# Altium PCB MCU098_MSPM0G3507_PCB.PcbDoc (part 5 of 5)
Units mil, origin at the board's own origin, x right, y up, seen from the top; angles counter-clockwise.
Board outline 2310.03 x 4205.03 mil, 4 copper layers (Top Layer, VCC Layer, GND Layer, Bottom Layer), stack 62.4 mil thick; 260 components, 182 nets, 835 pads, 237 vias.
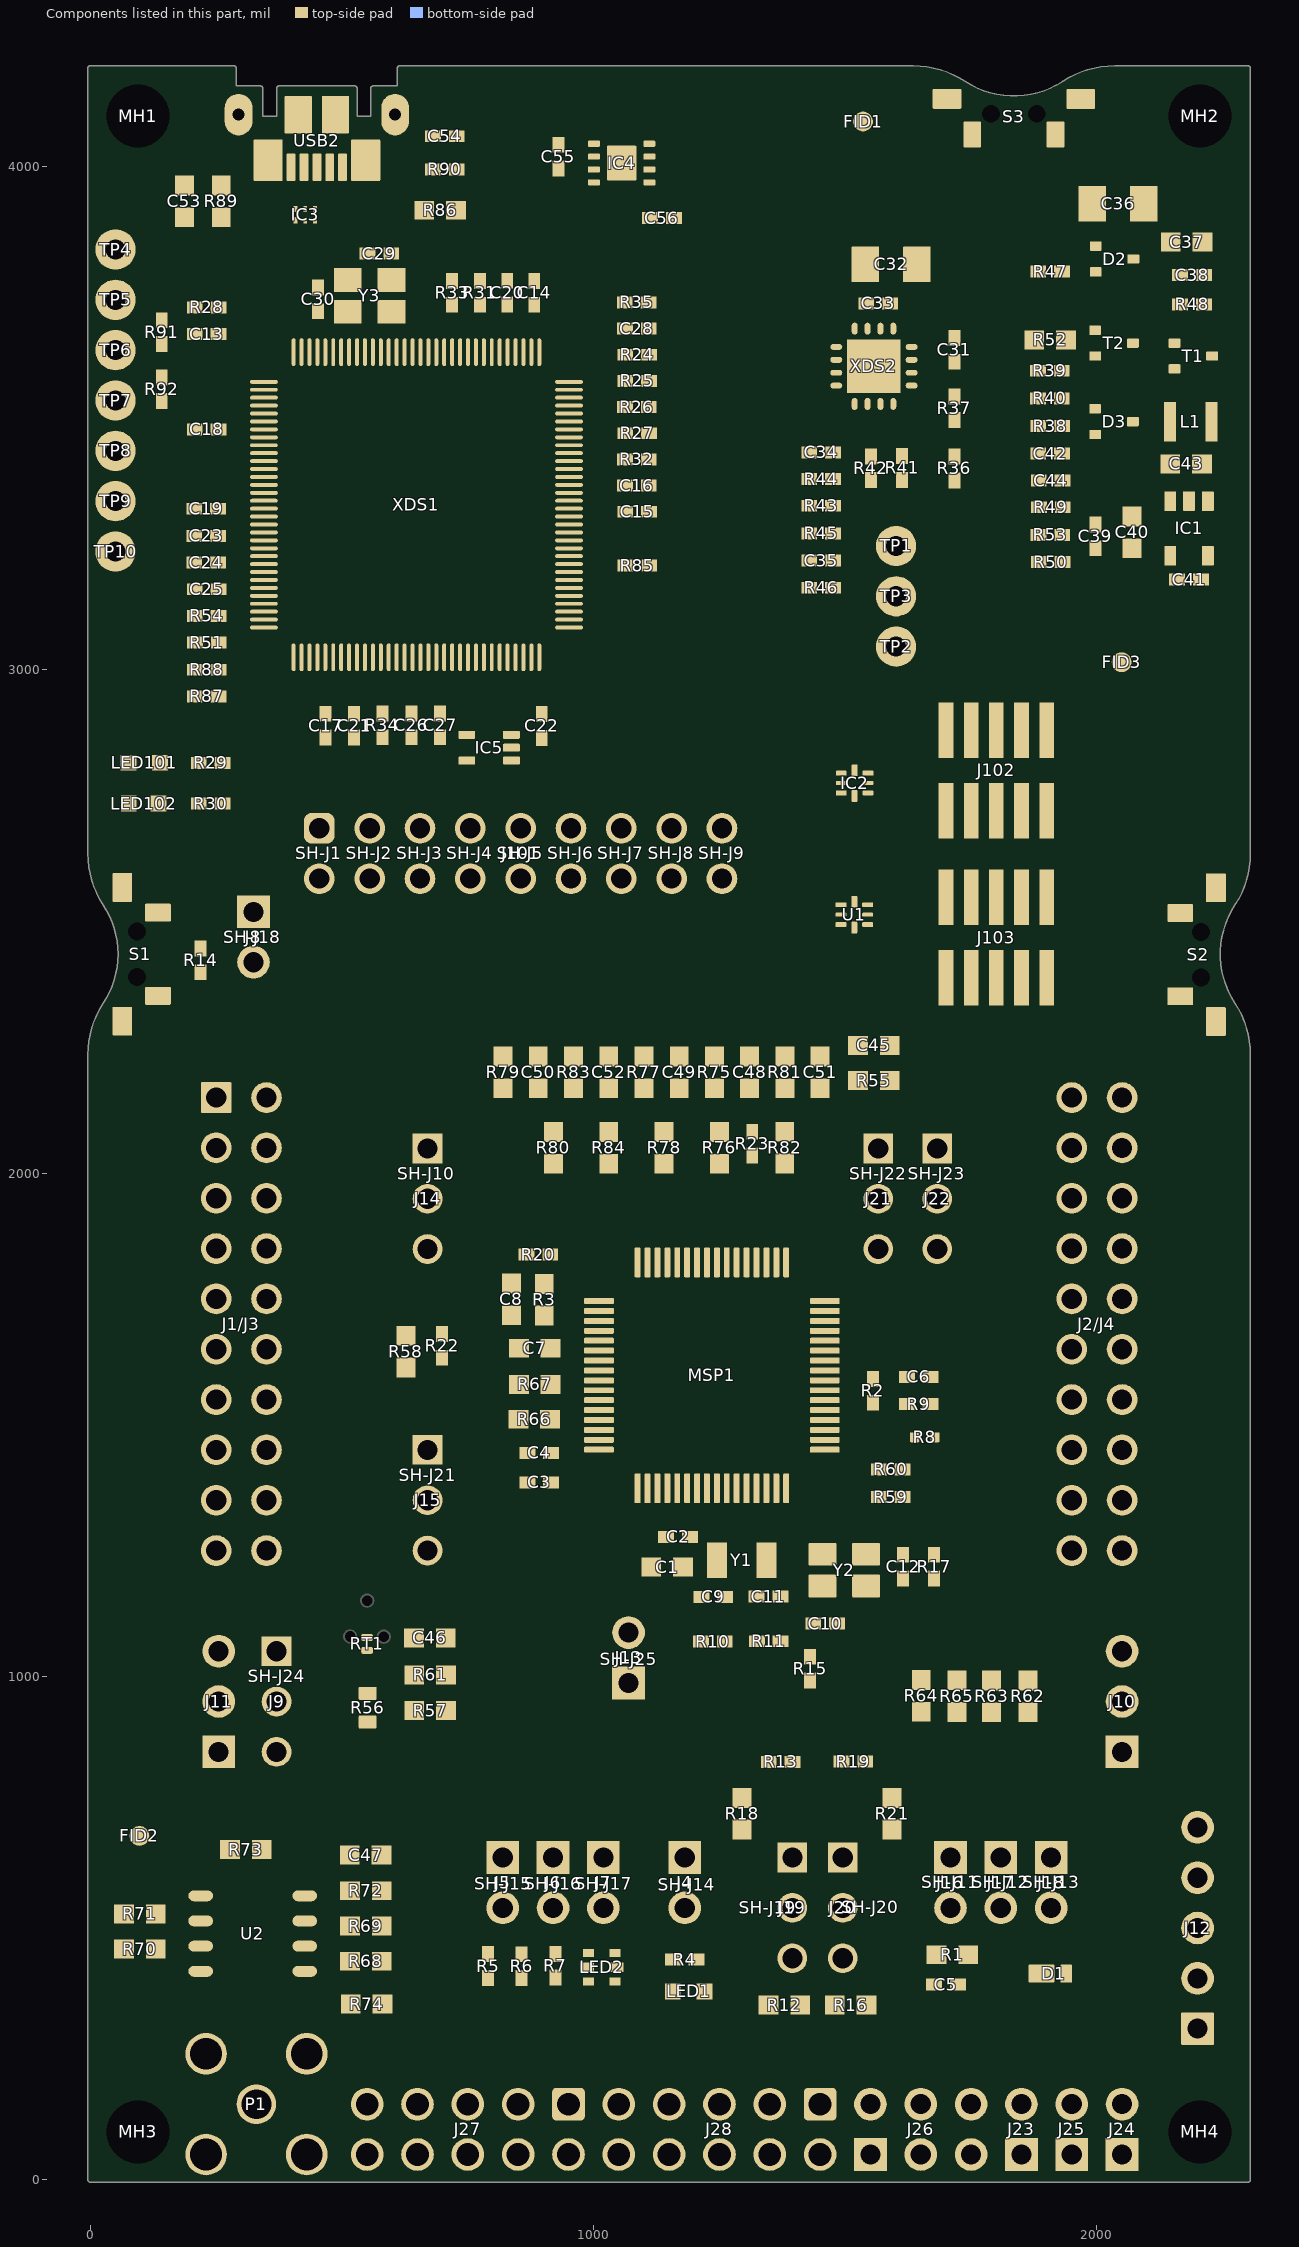
[diagram p6: the components of this part, seen from the top]

## Polygon pours and split planes (outlines as drawn)
GND on Top Layer "TOP_LAYER_GND_P034" (solid, remove dead copper, pour order 34): 0,2635 2300,2635 2300,0 713,0 713,780.96 0.04,780.96 0,781
XDS_GND on Top Layer "TOP_LAYER_XDS_GND_P010" (solid, remove dead copper, pour order 10): -6,4201 2306,4201 2306,2635 -6,2635
GND on Top Layer "TOP_LAYER_GND_P022" (solid, remove dead copper, pour order 22): 0,760 689.04,760 689.12,100.84 490.16,100.84 490.16,0.16 0.16,0.16
XDS_VCC on Top Layer "TOP_LAYER_XDS_VCC_P004" (solid, pour order 4): 1140,3985 1230,3985 1230,3845 1140,3845
GND on GND Layer "GND_LAYER_GND_P030" (solid, remove dead copper, pour order 30): 0,2635 2300,2635 2300,0 713,0 713,780.96 712.96,781 0,781
GND on GND Layer "GND_LAYER_GND_P026" (solid, remove dead copper, pour order 26): 0,760 689.12,760 689.12,100.84 688.28,100 490.16,100 490.16,0.16 0.08,0.08
XDS_GND on GND Layer "GND_LAYER_XDS_GND_P008" (solid, remove dead copper, pour order 8): -6,4201 2306,4201 2306,2635 -6,2635
3V3 on VCC Layer "VCC_LAYER_3V3_P032" (solid, remove dead copper, pour order 32): 810.03,781 810.03,1979.03 809.53,1979.53 1670,1979.53 1670,200 1799,200 1800,199 1800,0 2300,0 2300,2635 0,2635 0,781
GND on VCC Layer "VCC_LAYER_GND_P024" (solid, remove dead copper, pour order 24): 0,760 689.12,760 689.12,100.84 490.16,100.84 490.16,0.16 0,0
XDS_VCC on VCC Layer "GND_LAYER_GND_P-001" (solid, remove dead copper, pour order 38): 0,4195 2300,4195 2300,2635 0,2635
GND on Bottom Layer "BOTTOM_LAYER_GND_P036" (solid, remove dead copper, pour order 36): 0,2635 2300,2635 2300,0 713,0 713,780.96 0.04,780.96 0,781
GND on Bottom Layer "BOTTOM_LAYER_GND_P028" (solid, remove dead copper, pour order 28): 0,760 689.04,760 689.12,100.84 490.16,100.84 490.16,0.16 0,0
XDS_GND on Bottom Layer "BOTTOM_LAYER_XDS_GND_P014" (solid, remove dead copper, pour order 14): -6,4201 2306,4201 2306,2635 -6,2635

## Keep-outs
Keep-Out Layer:
  text ".Layer_Name" at 527,-1523.49 h30

## Other copper
Top Layer:
  pour cut-out: 1066.51,2005.88 1067.52,2006.9 1104.3,2006.9 1104.3,1894.73 1063.1,1853.53
  pour cut-out: 599.99,780.96 631.47,780.96 677.87,827.37 677.87,827.94 737.66,827.94 866.42,956.69 866.42,996.4 868.17,998.16 823.34,998.16 823.34,988.24 753.6,918.5 728.84,918.5 676.81,904.46 675.54,905.73 600.68,905.73
  pour cut-out: 406.6,814.25 400.92,814.25 391.03,824.14 420,853.11 432.79,853.11 499.14,919.47 505.79,919.47
  pour cut-out: 433,934 437.31,923.5 444.47,910.24 468.2,933.97 468.29,933.97
  pour cut-out: 583,1175.1 611.47,1175.1 611.47,1109.2 607.54,1109.2
  pour cut-out: 1849,494.1 1963.28,492.42 1962.43,359.5 1849,359.5
  pour cut-out: 1928.42,2326 1928.42,2484 1727.58,2484 1727.58,2326
  pour cut-out: 1928.42,2656 1928.42,2814 1727.58,2814 1727.58,2656
  pour cut-out: 1447,1156.65 1480.53,1156.65 1481.53,1157.65 1481.53,1030.39 1455.14,1004 1444.88,1004
  pour cut-out: 1689.03,1245.54 1689.49,1246 1689.49,1201.49 1687,1199 1512.84,1199 1508.34,1203.5 1508.34,1245.54
  pour cut-out: 939,373 952.81,373 952.81,362 951.81,363 939.14,363
  pour cut-out: 1014.63,379 1047.36,379 1048,378.36 1048,359 1015.63,359 1014.63,360
  pour cut-out: 1625.8,645.8 1636.86,645.8 1668.06,677 1675,670.06 1673,359.34 1631.34,359.34
  pour cut-out: 711.62,1561.3 732.32,1555.67 753.51,1551.54 746.51,1254.51 745,1253 736.13,1261.87 705,1261.87
  pour cut-out: 1280.41,1262.5 1307.97,1262.5 1306.72,1261.24 1306.72,1178.57 1280.07,1178.57 1280,1178.5 1280,1262.08
  pour cut-out: 1891.63,1965.67 1678.64,1752.68 1678.64,1731.36 1690.89,1719.11 1819.11,1719.11 1950,1850 1950,1939.79
  pour cut-out: 1699.39,1889.25 1717.69,1870.94 1717.69,1869.87 1728.96,1869.87 1953.5,2094.41 1952.4,2095.5 1952.4,2114.25 1933.37,2114.25 1930.62,2117
  pour cut-out: 882.87,1415.19 899.59,1415.19 899.59,1414.08 882.87,1414.08
  pour cut-out: 882.87,1415.19 899.59,1415.19 899.59,1414.08 882.87,1414.08
  pour cut-out: 612.37,511 620.78,511 621,510.78 621,468.29 612.37,468.29
  text ".Layer_Name" at 527,-1523.49 h30
VCC Layer:
  pour cut-out: 624.77,811.49 624.77,781.87 623.86,780.96 599.99,780.96
  pour cut-out: 561,811.49 561,780.87 561.09,780.96 576.33,780.96
  text ".Layer_Name" at 527,-1523.49 h30
GND Layer:
  pour cut-out: 560.84,808.35 560.84,781.15 561,781 561.7,781.71 575.08,781.71
  text ".Layer_Name" at 527,-1523.49 h30
Bottom Layer:
  pour cut-out: 741.57,1030.47 741.57,970.96 752.17,960.36 775.18,983.37 834.16,983.37 834.16,995.31 797.72,1031.75
  pour cut-out: 548,1233 548,1195.91 595.47,1195.91 573.5,1217.88 573.5,1220.09
  pour cut-out: 624.77,811.49 624.77,780.96 599.99,780.96
  pour cut-out: 560.84,808.35 560.84,781.15 561.04,780.96 576.33,780.96
  text ".Layer_Name" at 527,-1523.49 h30

## Silkscreen, mask and mechanical layers (free items; w line width, h text height)
Top Overlay:
  drawing of 1933 lines, arcs and shapes, not listed
  text "MSP NRST" at 1606.35,3946.95 h40
  text "Rev. A" at 2264.13,2813.42 h50 r90
  text "XDS110-ET Debug Probe" at 428.03,2753 h30
  text "Rev1.4" at 1158,2747 h30
  text "XDS110 Out" at 1650.72,2668 h30 r90
  text "LP-MSPM0G3507" at 2205.15,2665.28 h65 r90
  text "(PB21)" at 1946.02,2381.37 h40
  text "BSL" at 1277.43,2376.37 h40 r90
  text "NRST" at 980,2358 h40 r90
  text "SWDIO" at 1074.13,2342 h40 r90
  text "SWCLK" at 1169.54,2342 h40 r90
  text "RXD<<" at 775,2340 h40 r90
  text "TXD>>" at 875,2340 h40 r90
  text "XDS110 In" at 1647,2340.5 h30 r90
  text "(PA18)" at 240.75,2280.75 h40
  text "PB4" at 1750,2130 h60
  text "PB4" at 1750.21,2130 h60
  text "XDS" at 1404.48,2031.35 h60
  text "PA25" at 50,2030 h60
  text "PB1" at 1750,2030 h60
  text "PB12" at 2160,2030 h60
  text "PB23" at 735.69,2027 h60
  text "SW1" at 50,1930 h60
  text "PB19" at 460,1930 h60
  text "PA28" at 1750,1930 h60
  text "PB17" at 2160,1930 h60
  text "SW1" at 751.47,1927.61 h60
  text "UART" at 1479.2,1899.56 h40 r90
  text "MSPM0G3507" at 1075.32,1867.37 h50
  text "BP" at 1440.73,1834.22 h60
  text "PA8" at 50,1830 h60
  text "PA22" at 460,1830 h60
  text "PA9" at 735,1830 h60
  text "PA31" at 1750,1830 h60
  text "PB15" at 2160,1830 h60
  text "PA26" at 50,1730 h60
  text "PB18" at 460,1730 h60
  text "PB20" at 1750,1730 h60
  text "NRST" at 2160,1730 h60
  text "PB24" at 50,1630 h60
  text "PA18" at 460,1630 h60
  text "PB13" at 1750,1630 h60
  text "PB8" at 2160,1630 h60
  text "PB9" at 50,1530 h60
  text "PA24" at 460,1530 h60
  text "PA10" at 1750,1530 h60
  text "PB7" at 2160,1530 h60
  text "PA27" at 50,1430 h60
  text "PA17" at 460,1430 h60
  text "PA11" at 1750,1430 h60
  text "PB6" at 2160,1430 h60
  text "PB2" at 50,1330 h60
  text "SW2" at 460,1330 h60
  text "PA12" at 1750,1330 h60
  text "PB0" at 2160,1330 h60
  text "PA16" at 818.4,1296 h60
  text "SW2" at 818,1238 h60
  text "PB3" at 50,1230 h60
  text "PA15" at 460,1230 h60
  text "PA13" at 1750,1230 h60
  text "PB16" at 2160,1230 h60
  text "PA18" at 819,1180 h60
  text "Thermistor" at 633.72,1110 h60
  text "PB24" at 467,993.43 h60 r90
  text "A.PWR" at 1005.13,939.83 h60 r90
  text "PA26" at 468.29,791 h60 r90
  text "PA22" at 1700.04,779.62 h60 r45
  text "PA27" at 1800,780 h60 r45
  text "PA26" at 1900,779 h60 r45
  text "PB22" at 786.74,775.84 h60 r45
  text "PA0" at 1160.62,775 h60 r45
  text "PB27" at 985.59,774 h60 r45
  text "PB26" at 887.2,773 h60 r45
  text "OPA2365" at 200,702.38 h60
  text "3V" at 1263.78,611 h60
  text "3V" at 1561.78,611 h60
  text "5V" at 1264.78,423.62 h60
  text "5V" at 1560.78,422.62 h60
  text "QEI Interface" at 2125.72,310.72 h80 r90
  text "B25" at 610,260 h50
  text "B11" at 809.84,260 h50
  text "B5" at 923.84,260 h50
  text "A14" at 1109.62,260 h50
  text "A6" at 1223,260 h50
  text "A4" at 1322,259.58 h50
  text "A2" at 1418,260 h50
  text "GND" at 1501,260.16 h50
  text "GND" at 1603.72,260.16 h50
  text "A11" at 1708,260 h50
  text "A0" at 522.4,258.56 h50
  text "B22" at 709.84,259 h50
  text "A1" at 1024,258.56 h50
  text "GND" at 2004,236 h50
  text "5V" at 1825.92,234 h50
  text "3V3" at 1908.5,234 h50
  text "B27" at 509.84,209.66 h50
  text "B26" at 609.84,209.66 h50
  text "B23" at 710,209.66 h50
  text "B21" at 810,210 h50
  text "B10" at 910,209.67 h50
  text "A23" at 1009.84,210 h50
  text "A21" at 1110.13,210 h50
  text "A7" at 1223,210 h50
  text "A5" at 1322,210 h50
  text "A3" at 1418,210 h50
  text "A12" at 1500,210 h50
  text "A13" at 1606.03,210 h50
  text "A10" at 1708,210 h50
  text ".Layer_Name" at 527,-1523.49 h30
Bottom Overlay:
  drawing of 24769 lines, arcs and shapes, not listed
  text "PB4" at 1868.21,2129.3 h60
  text "PA25" at 145.94,2030.07 h60
  text "PB1" at 1868,2029.3 h60
  text "PB12" at 2278,2029.3 h60
  text "SW1" at 145.94,1930.07 h60
  text "PB19" at 555.94,1930.07 h60
  text "PA28" at 1868,1929.3 h60
  text "PB17" at 2278,1929.3 h60
  text "PA8" at 145.94,1830.07 h60
  text "PA22" at 555.94,1830.07 h60
  text "PA31" at 1868,1829.3 h60
  text "PB15" at 2278,1829.3 h60
  text "PA26" at 145.94,1730 h60
  text "PB18" at 555.94,1730.07 h60
  text "PB20" at 1868,1729.3 h60
  text "NRST" at 2278,1729.3 h60
  text "PB24" at 145.94,1630 h60
  text "PA18" at 555.94,1630.07 h60
  text "PB13" at 1868,1629.3 h60
  text "PB8" at 2278,1629.3 h60
  text "PB9" at 145.94,1530.07 h60
  text "PA24" at 555.94,1530.07 h60
  text "PA10" at 1868,1529.3 h60
  text "PB7" at 2278,1529.3 h60
  text "PA27" at 145.94,1430.07 h60
  text "PA17" at 555.94,1430.07 h60
  text "PA11" at 1868,1429.3 h60
  text "PB6" at 2278,1429.3 h60
  text "PB2" at 145.94,1330.07 h60
  text "SW2" at 555.94,1330.07 h60
  text "PA12" at 1868,1329.3 h60
  text "PB0" at 2278,1329.3 h60
  text "PB3" at 145.94,1230.07 h60
  text "PA15" at 555.94,1230.07 h60
  text "PA13" at 1868,1229.3 h60
  text "PB16" at 2278,1229.3 h60
  text "GND" at 2128,682.97 h60
  text "3V3" at 2128,582.97 h60
  text "PB14" at 2128,481.97 h60
  text "PA30" at 2128,382.97 h60
  text "PA29" at 2128,282.97 h60
  text ".Layer_Name" at 527,-1523.49 h30
Top Paste:
  text ".Layer_Name" at 527,-1523.49 h30
Bottom Paste:
  text ".Layer_Name" at 527,-1523.49 h30
Top Solder:
  text ".Layer_Name" at 527,-1523.49 h30
  text ".Layer_Name" at 527,-1523.49 h30
Bottom Solder:
  text ".Layer_Name" at 527,-1523.49 h30
Drill Guide:
  text ".Layer_Name" at 527,-1523.49 h30
M1 Board Outline:
  lines w10: 0,0 0,2235 ; 0,0 2300,0 ; 0,0 2300,0 ; 0,0 0,2235 ; 0,2235 cw(c181.67,2235) 30,2335 ; 0,2235 cw(c181.67,2235) 30,2335 ; 0,2635 ccw(c181.67,2635) 30,2535 ; 0,2635 ccw(c181.67,2635) 30,2535 ; 0,2635 0,4195 ; 0,2635 0,4195 ; 0,4195 285,4195 ; 0,4195 285,4195 ; 30,2335 ccw(c-121.67,2435) 30,2535 ; 30,2335 ccw(c-121.67,2435) 30,2535 ; 30,2535 30,2535 ; 285,4155 338,4155 ; 285,4155 285,4195 ; 285,4155 285,4195 ; 285,4155 338,4155 ; 338,4095 375,4095 ; 338,4095 338,4155 ; 338,4095 338,4155 ; 338,4095 375,4095 ; 375,4095 375,4155 ; 375,4095 375,4155 ; 375,4155 525,4155 ; 375,4155 525,4155 ; 525,4095 562,4095 ; 525,4095 525,4155 ; 525,4095 525,4155 ; 525,4095 562,4095 ; 562,4095 562,4155 ; 562,4095 562,4155 ; 562,4155 615,4155 ; 562,4155 615,4155 ; 615,4155 615,4195 ; 615,4155 615,4195 ; 615,4195 1635,4195 ; 615,4195 1635,4195 ; 1635,4195 cw(c1635,4013.33) 1735,4165 ; 1635,4195 cw(c1635,4013.33) 1735,4165 ; 1735,4165 ccw(c1835,4316.67) 1935,4165 ; 1735,4165 ccw(c1835,4316.67) 1935,4165 ; 1935,4165 cw(c2035,4013.33) 2035,4195 ; 1935,4165 cw(c2035,4013.33) 2035,4195 ; 1935,4165 1935,4165 ; 2035,4195 2300,4195 ; 2035,4195 2300,4195 ; 2270,2335 cw(c2118.33,2235) 2300,2235 ; 2270,2335 cw(c2421.67,2435) 2270,2535 ; 2270,2335 cw(c2421.67,2435) 2270,2535 ; 2270,2335 cw(c2118.33,2235) 2300,2235 ; 2270,2335 2270,2335 ; 2270,2535 ccw(c2118.33,2635) 2300,2635 ; 2270,2535 ccw(c2118.33,2635) 2300,2635 ; 2300,0 2300,2235 ; 2300,0 2300,2235 ; 2300,2635 2300,4195 ; 2300,2635 2300,4195
  text ".Layer_Name" at 527,-1523.49 h30
M2 Board Dimensions:
  rectangle: 75,-1065 450,-940
  rectangle: -50,-940 75,-815
  lines w7: -50,-940 950,-940 ; 75,-1065 75,-815 ; 200,-1065 200,-815 ; 450,-1065 450,-815 ; 700,-1065 700,-815 ; -50,-1065 -50,-815 950,-815 950,-1065 -50,-1065
  lines w10: 1711,4198.98 1711,4256.98 1917,4462.98 1987.5,4462.98 ; 1835,4160.98 1835,4278.98 1919,4362.98 1995,4362.98 ; 1955,4198.98 1955,4252.98 1980,4277.98 1995,4277.98 ; 1980,4462.98 1995,4462.98 ; 2350,4197.98 2375,4222.98 2375,4512.98 2350,4537.98
  text "Radius 180" at 2015,4437.98 h30
  text "Radius 180" at 2015,4342.98 h30
  text "3 Places" at 2450,4340 h30
  text "Radius 180" at 2015,4252.98 h30
  text ".Layer_Name" at 527,-1523.49 h30
M3 3D STEP Top:
  text ".Layer_Name" at 527,-1523.49 h30
M4 3D STEP Bottom:
  text ".Layer_Name" at 527,-1523.49 h30
M5 Assembly Top:
  circle w6: c1382.04,1872 r5.83
  lines w10: -342,-1595.17 6258,-1595.17 ; -342,-1391.83 6260,-1391.83 ; -342,-1188.5 -342,-1798.5 3663,-1798.5 6260,-1798.5 6260,-1188.5 -341.5,-1188.5 -341.5,-1798.5 1234,-1798.5 ; 2123,-1798.5 2123,-1188.5 ; 3390,-1391.83 3390,-1188.5 ; 4230,-1391.83 4230,-1188.5 ; 4852,-1805 4852,-1602.17
  text "COMPONENTS MARKED 'DNP' SHOULD NOT BE POPULATED." at 1103.5,-983.5 h30
  text "ASSEMBLY VARIANT:" at 1103,-1099 h30
  text ".VariantName" at 2139,-1099 h30
  text "PCB VIEWED FROM TOP SIDE" at -278.5,-1320.67 h30
  text "BOARD #:" at 2198,-1320.67 h30
  text ".PRJ_Number" at 2743.5,-1320.67 h30
  text "REV:" at 3588,-1320.67 h30
  text ".PCB_Rev" at 3879.5,-1320.67 h30
  text "SVN REV:" at 4426,-1320.67 h30
  text ".VersionControl_RevNumber" at 4932,-1320.67 h30
  text "TID #:" at 2198,-1524 h30
  text ".TID" at 2743.5,-1524 h30
  text "PLOT NAME =" at -278.5,-1729.34 h30
  text ".plot_File_Name" at 527,-1729.34 h30
  text "GENERATED    :" at 2200,-1729.34 h30
  text ".Print_Date" at 3069.5,-1729.34 h30
  text ".Print_Time" at 3798.5,-1729.34 h30
  text "TEXAS INSTRUMENTS" at 5063,-1729.34 h30
M6 Assembly Bottom:
  lines w10: -342.5,-1392.33 6259.5,-1392.33 ; -340.5,-1595.67 6259.5,-1595.67 ; 1065.5,-1805.5 1065.5,-1602.67 ; 1687.5,-1392.33 1687.5,-1189 ; 2527.5,-1392.33 2527.5,-1189 ; 3794.5,-1799 3794.5,-1189 ; 4683.5,-1799 6259,-1799 6259,-1189 -342.5,-1189 -342.5,-1799 2254.5,-1799 6259.5,-1799 6259.5,-1189
  text "COMPONENTS MARKED 'DNP' SHOULD NOT BE POPULATED." at 6052,-983 h30
  text ".VariantName" at 5008,-1099 h30
  text "ASSEMBLY VARIANT:" at 6047,-1099 h30
  text ".VersionControl_RevNumber" at 985.5,-1321.17 h30
  text "SVN REV:" at 1491.5,-1321.17 h30
  text ".PCB_Rev" at 2038,-1321.17 h30
  text "REV:" at 2329.5,-1321.17 h30
  text ".PRJ_Number" at 3174,-1321.17 h30
  text "BOARD #:" at 3719.5,-1321.17 h30
  text "PCB VIEWED FROM BOTTOM SIDE" at 6196,-1321.17 h30
  text ".TID" at 3174,-1524.5 h30
  text "TID #:" at 3719.5,-1524.5 h30
  text "TEXAS INSTRUMENTS" at 854.5,-1729.84 h30
  text ".Print_Time" at 2119,-1729.84 h30
  text ".Print_Date" at 2848,-1729.84 h30
  text "GENERATED    :" at 3717.5,-1729.84 h30
  text ".plot_File_Name" at 5390.5,-1729.84 h30
  text "PLOT NAME =" at 6196,-1729.84 h30
M9 Title Sheet:
  drawing of 57 lines, arcs and shapes, not listed
  text "1" at 689.84,7371.5 h30
  text "2" at 3185.5,7371.5 h30
  text "3" at 5674.84,7371.5 h30
  text "4" at 8181.51,7371.5 h30
  text "5" at 10680.5,7371.5 h30
  text "6" at 13185.5,7371.5 h30
  text "A" at -466.5,6228.5 h30
  text "A" at 14333.5,6228.5 h30
  text "B" at -466.5,3848.5 h30
  text "B" at 14333.5,3848.5 h30
  text "C" at -466.5,1473.5 h30
  text "C" at 14333.5,1473.5 h30
  text "PROJECT TITLE:" at 11293.5,-387.5 h30
  text ".PRJ_Title" at 11343.5,-520.83 h30
  text "DESIGNED FOR:" at 11293.5,-688.5 h30
  text ".PRJ_Customer" at 11343.5,-828.5 h30
  text "D" at -466.5,-896.5 h30
  text "D" at 14333.5,-896.5 h30
  text "FILE NAME:" at 11293.5,-988.5 h30
  text ".PCB_File_Name_No_Path" at 11343.5,-1108.5 h30
  text "Texas Instruments (TI) and/or its licensors do not warrant the accuracy or completeness of this specification" at 6324,-1270.34 h30
  text "ENGINEER:" at 11293.5,-1278.5 h30
  text "LAYOUT BY:" at 12798.5,-1278.5 h30
  text "or any information contained therein. TI and/or its licensors do not warrant that this design will meet" at 6279.01,-1383 h30
  text ".PRJ_Engineer" at 11343.5,-1433.49 h30
  text ".PCB_Layout" at 12849,-1433.49 h30
  text "the specifications, will be suitable for your application or fit for any particular purpose, or will operate in" at 6279.01,-1495.67 h30
  text ".Layer_Name" at 527,-1523.49 h30
  text "ALTIUM DESIGNER VERSION:" at 12798.5,-1588.5 h30
  text "an implementation. TI and/or its licensors do not warrant that the design is production worthy. You should" at 6279.01,-1608.33 h30
  text "completely validate and test your design implementation to confirm the system functionality for your application." at 6324,-1721 h30
  text ".print_Scale" at 11343.5,-1721.83 h30
  text ".Application_BuildNumber" at 12849,-1721.83 h30
  text "1" at 689.84,-1928.5 h30
  text "2" at 3185.5,-1928.5 h30
  text "3" at 5674.84,-1928.5 h30
  text "4" at 8181.51,-1928.5 h30
  text "5" at 10680.5,-1928.5 h30
  text "6" at 13185.5,-1928.5 h30
M10 Fab Notes:
  drawing of 173 lines, arcs and shapes, not listed
  text "DESIGN INFORMATION" at 12328.02,5536 h30
  text "MIN. TRACK WIDTH:" at 11683.46,5356 h30
  text "8" at 12779.7,5356 h30
  text "MIL" at 12934.46,5356 h30
  text "MIN. CLEARANCE:" at 11683.46,5224 h30
  text "0.2" at 12719.7,5224 h30
  text "mm" at 12934.46,5224 h30
  text "MIN. VIA PAD SIZE:" at 11683.46,5092 h30
  text "24" at 12749.71,5092 h30
  text "MIL" at 12934.46,5092 h30
  text "0.05mm (2MIL)" at 12378.46,4950.29 h30
  text "MINIMUM ANNULAR RING" at 11354.23,4946 h30
  text "EXTERNAL" at 13086.46,4946 h30
  text "PER" at 11554.23,4828 h30
  text "IPC-D-275 CLASS 2 LEVEL C" at 11774.23,4828 h30
  text "MIL, HOLES" at 13262.46,4715.71 h30
  text "+/-" at 12870,4715 h30
  text "+/-" at 13724,4715 h30
  text "REGISTRATION TOLERANCES:" at 11354.23,4710 h30
  text "METAL" at 12554,4710 h30
  text "5" at 13130.2,4710 h30
  text "3" at 13963.2,4710 h30
  text "MIL" at 14079.46,4710 h30
  text "+/-" at 13724,4597 h30
  text "HOLE SIZE TOLERANCE (UNLESS OTHERWISE SPECIFIED):" at 11354.23,4592 h30
  text "3" at 13963.2,4592 h30
  text "MIL" at 14079.46,4592 h30
  text "MATERIAL:" at 11279.46,4382.54 h30
  text "FR-4 High Tg" at 12265.9,4242.21 h30
  text "FR-408" at 11700.46,4233.64 h30
  text "OTHER" at 13188.46,4233.64 h30
  text "X" at 12111,4230 h30
  text "62 MIL (1.6mm) +/-10%" at 12020.56,4070.92 h30
  text "THICKNESS:" at 11354.23,4066.64 h30
  text "X" at 11892.4,4066.64 h30
  text "OTHER" at 13305.46,4066.64 h30
  text "TOLERANCE:" at 11354.23,3908.64 h30
  text "X" at 12193.53,3908.64 h30
  text "ANSI IPC-6012 TYPE 3 CLASS 2" at 12380.48,3908.64 h30
  text "OTHER +/-" at 12380.46,3752.64 h30
  text "BOW & TWIST:" at 11354.23,3595.64 h30
  text "X" at 12193.53,3595.64 h30
  text "ANSI IPC-6012 TYPE 3 CLASS 2" at 12380.48,3595.64 h30
  text "OTHER +/-" at 12380.46,3437.13 h30
  text "DRILLING:" at 11279.46,3298.64 h30
  text "REFERENCE:" at 11354.23,3181.64 h30
  text "X" at 12002.46,3181.64 h30
  text "AS SHOWN" at 12189.46,3181.64 h30
  text "X" at 12903.46,3181.64 h30
  text "NC_DRILL FILES" at 13040.46,3181.64 h30
  text "PTH COPPER THICKNESS:" at 11354.23,3023.64 h30
  text "X" at 12484.46,3023.64 h30
  text "20-30 um" at 12621.46,3023.64 h30
  text "OTHER" at 13338.46,3023.64 h30
  text "BOARD FINISH:" at 11279.46,2864.64 h30
  text "SILKSCREEN:" at 11434.68,2746.64 h30
  text "X" at 12383.46,2746.64 h30
  text "TOP" at 12509.46,2746.64 h30
  text "X" at 12893.46,2746.64 h30
  text "BOTTOM" at 13020.46,2746.64 h30
  text "SILKSCREEN COLOR:" at 11434.68,2579.64 h30
  text "X" at 12382.42,2579.64 h30
  text "WHITE" at 12509.46,2579.64 h30
  text "OTHER" at 13020.46,2579.64 h30
  text "GREEN" at 12640.46,2420.44 h30
  text "X" at 13105,2420 h30
  text "OTHER" at 13258.46,2420.44 h30
  text "Red" at 13655,2420 h30
  text "SOLDER RESIST COLOR:" at 11434.68,2409.64 h30
  text "X" at 12513.42,2250.44 h30
  text "MATTE" at 12640.46,2250.44 h30
  text "SEMI-GLOSS" at 13258,2249.8 h30
  text "IMMERSION GOLD (ENIG)" at 12340.46,2061.92 h30
  text "ENEPIG" at 13678,2058.64 h30
  text "SURFACE FINISH:" at 11279.46,2057.64 h30
  text "IMM. TIN/SILVER OR EQUIV" at 11609,1900.64 h30
  text "OTHER" at 13040.46,1900.64 h30
  text "X" at 11445,1900 h30
  text "ARRAY/PANEL:" at 11279.46,1721.64 h30
  text "CUT AND TRIM PER M1 BOARD OUTLINE" at 12340.46,1717.35 h30
  text "N.C. ROUTE" at 12340.46,1565.64 h30
  text "X" at 13019.46,1565.64 h30
  text "V. SCORE" at 13206.46,1565.64 h30
  text "CERTIFICATION:" at 11279.46,1428.64 h30
  text "MATERIALS AND WORKMANSHIP FOR ALL PCBS" at 12004.46,1428.64 h30
  text "TO MEET OR EXCEED THE REQUIREMENTS OF:" at 12004.46,1330.64 h30
  text "X" at 11630.96,1194.13 h30
  text "ANSI IPC-A-600F CLASS ->" at 11769.96,1194.13 h30
  text "X" at 13409.02,1194.13 h30
  text "2" at 13527.96,1194.14 h30
  text "1" at 13212.96,1192.64 h30
  text "3" at 13881.96,1192.64 h30
  text "X" at 12445.02,1034.64 h30
  text "RoHS" at 12581.96,1034.64 h30
  text "OTHER" at 13226.36,1034.64 h30
  text "PER ORDER" at 13623.42,1034.64 h30
  text "ALL BOARDS MUST MEET OR EXCEED UL94-V0 REQUIREMENTS." at 11307,869 h30
  text "PCB MUST BEAR THE UL94V-0 UL REGISTERED MATERIAL ID NUMBER" at 11307,749 h30
  text "ADDITIONAL REQUIREMENTS:" at 11279.46,575.64 h30
  text "MICROSECTION:" at 11354.23,460.64 h30
  text "YES" at 12259.96,460.64 h30
  text "X" at 13585,305 h30
  text "REQUIRED" at 13121.46,304.49 h30
  text "BARE BOARD ELEC. TEST:" at 11354.23,301.64 h30
  text "NONE" at 12659.96,301.64 h30
  text "PER ORDER" at 13713.46,301.64 h30
  text ".Layer_Name" at 527,-1523.49 h30
M11 Gerber Information:
  lines w10: -342,-1595.17 6258,-1595.17 ; -342,-1391.83 6260,-1391.83 ; -342,-1188.5 -342,-1798.5 3663,-1798.5 6260,-1798.5 6260,-1188.5 -341.5,-1188.5 -341.5,-1798.5 1234,-1798.5 ; 2123,-1798.5 2123,-1188.5 ; 3390,-1391.83 3390,-1188.5 ; 4230,-1391.83 4230,-1188.5 ; 4852,-1805 4852,-1602.17
  text "ALL ARTWORK VIEWED FROM TOP SIDE" at -278.5,-1320.67 h30
  text "BOARD #:" at 2198,-1320.67 h30
  text ".PRJ_Number" at 2743.5,-1320.67 h30
  text "REV:" at 3588,-1320.67 h30
  text ".PCB_Rev" at 3879.5,-1320.67 h30
  text "SVN REV:" at 4426,-1320.67 h30
  text ".VersionControl_RevNumber" at 4932,-1320.67 h30
  text "LAYER NAME =" at -278.5,-1523.49 h30
  text "TID #:" at 2198,-1524 h30
  text ".TID" at 2743.5,-1524 h30
  text "PLOT NAME =" at -278.5,-1729.34 h30
  text ".plot_File_Name" at 527,-1729.34 h30
  text "GENERATED    :" at 2200,-1729.34 h30
  text ".Print_Date" at 3069.5,-1729.34 h30
  text ".Print_Time" at 3798.5,-1729.34 h30
  text "TEXAS INSTRUMENTS" at 5063,-1729.34 h30
M12 Stackup:
  drawing of 295 lines, arcs and shapes, not listed
  text "Layer" at 8601.29,5576 h30
  text "Name" at 8816.24,5576 h30
  text "Material" at 9291.12,5576 h30
  text "Thickness" at 9581.05,5576 h30
  text "Constant" at 9915.97,5576 h30
  text "Board Layer Stack" at 10210.9,5576 h30
  text "Top Overlay" at 8816.24,5516 h30
  text "Top Solder" at 8816.24,5456 h30
  text "SM-004" at 9291.12,5456 h30
  text "0.98mil" at 9581.05,5456 h30
  text "4" at 9915.97,5456 h30
  text "1" at 8601.29,5396 h30
  text "Top Layer" at 8816.24,5396 h30
  text "1.40mil" at 9581.05,5396 h30
  text "Dielectric 2" at 8816.24,5336 h30
  text "FR-4" at 9291.12,5336 h30
  text "8.40mil" at 9581.05,5336 h30
  text "4.2" at 9915.97,5336 h30
  text "2" at 8601.29,5276 h30
  text "VCC Layer" at 8816.24,5276 h30
  text "1.40mil" at 9581.05,5276 h30
  text "Dielectric1" at 8816.24,5216 h30
  text "FR-4" at 9291.12,5216 h30
  text "40.00mil" at 9581.05,5216 h30
  text "4.2" at 9915.97,5216 h30
  text "3" at 8601.29,5156 h30
  text "GND Layer" at 8816.24,5156 h30
  text "1.40mil" at 9581.05,5156 h30
  text "Dielectric 3" at 8816.24,5096 h30
  text "FR-4" at 9291.12,5096 h30
  text "8.40mil" at 9581.05,5096 h30
  text "4.2" at 9915.97,5096 h30
  text "4" at 8601.29,5036 h30
  text "Bottom Layer" at 8816.24,5036 h30
  text "1.40mil" at 9581.05,5036 h30
  text "Bottom Solder" at 8816.24,4976 h30
  text "SM-004" at 9291.12,4976 h30
  text "0.98mil" at 9581.05,4976 h30
  text "4" at 9915.97,4976 h30
  text "Bottom Overlay" at 8816.24,4916 h30
  text ".Layer_Name" at 527,-1523.49 h30
M13 Component Bodies Top:
  text ".Layer_Name" at 527,-1523.49 h30
M14 Component Bodies Bottom:
  text ".Layer_Name" at 527,-1523.49 h30
M15 Courtyards Top:
  text ".Layer_Name" at 527,-1523.49 h30
M16 Courtyards Bottom:
  text ".Layer_Name" at 527,-1523.49 h30
Drill Drawing:
  circle w10: c6074.13,4457.29 r10
  circle w10: c6074.13,4457.29 r16.67
  circle w10: c6074.13,3707.29 r16.67
  lines w10: 6057.46,3765.62 6074.13,3773.96 6090.79,3765.62 6082.46,3782.29 6090.79,3798.96 6074.13,3790.62 6057.46,3798.96 6065.79,3782.29 6057.46,3765.62 ; 6057.46,3840.62 6090.79,3840.62 6090.79,3873.96 6057.46,3873.96 6057.46,3840.62 ; 6057.46,3915.62 6057.46,3923.96 6065.79,3932.29 6057.46,3940.62 6057.46,3948.96 6065.79,3948.96 6074.13,3940.62 6082.46,3948.96 6090.79,3948.96 6090.79,3940.62 6082.46,3932.29 6090.79,3923.96 6090.79,3915.62 6082.46,3915.62 6074.13,3923.96 6065.79,3915.62 6057.46,3915.62 ; 6057.46,4007.29 6074.13,3990.62 6090.79,4007.29 6074.13,4023.96 6057.46,4007.29 ; 6057.46,4073.96 6065.79,4073.96 6065.79,4065.62 6082.46,4065.62 6082.46,4073.96 6090.79,4073.96 6090.79,4090.62 6082.46,4090.62 6082.46,4098.96 6065.79,4098.96 6065.79,4090.62 6057.46,4090.62 6057.46,4073.96 ; 6057.46,4140.62 6074.13,4148.96 6090.79,4140.62 6082.46,4157.29 6090.79,4173.96 6074.13,4165.62 6057.46,4173.96 6065.79,4157.29 6057.46,4140.62 ; 6057.46,4248.96 6090.79,4248.96 6074.13,4215.62 6057.46,4248.96 ; 6057.46,4323.96 6090.79,4323.96 6074.13,4290.62 6057.46,4323.96 ; 6057.46,4373.96 6065.79,4373.96 6074.13,4365.62 6082.46,4373.96 6090.79,4373.96 6082.46,4382.29 6090.79,4390.62 6082.46,4390.62 6074.13,4398.96 6065.79,4390.62 6057.46,4390.62 6065.79,4382.29 6057.46,4373.96 ; 6057.46,4515.62 6057.46,4523.96 6065.79,4532.29 6057.46,4540.62 6057.46,4548.96 6065.79,4548.96 6074.13,4540.62 6082.46,4548.96 6090.79,4548.96 6090.79,4540.62 6082.46,4532.29 6090.79,4523.96 6090.79,4515.62 6082.46,4515.62 6074.13,4523.96 6065.79,4515.62 6057.46,4515.62 ; 6057.46,4590.62 6090.79,4590.62 6090.79,4623.96 6057.46,4623.96 6057.46,4590.62 ; 6064.13,3772.29 6074.13,3777.29 6084.13,3772.29 6079.13,3782.29 6084.13,3792.29 6074.13,3787.29 6064.13,3792.29 6069.13,3782.29 6064.13,3772.29 ; 6064.13,4317.29 6084.13,4317.29 6074.13,4297.29 6064.13,4317.29 ; 6064.13,4377.29 6069.13,4377.29 6074.13,4372.29 6079.13,4377.29 6084.13,4377.29 6079.13,4382.29 6084.13,4387.29 6079.13,4387.29 6074.13,4392.29 6069.13,4387.29 6064.13,4387.29 6069.13,4382.29 6064.13,4377.29 ; 6064.13,4522.29 6064.13,4527.29 6069.13,4532.29 6064.13,4537.29 6064.13,4542.29 6069.13,4542.29 6074.13,4537.29 6079.13,4542.29 6084.13,4542.29 6084.13,4537.29 6079.13,4532.29 6084.13,4527.29 6084.13,4522.29 6079.13,4522.29 6074.13,4527.29 6069.13,4522.29 6064.13,4522.29 ; 6064.13,4597.29 6084.13,4597.29 6084.13,4617.29 6064.13,4617.29 6064.13,4597.29
  lines w12: 6026,3668.12 9906.95,3668.12 ; 6026,4643.12 9906.95,4643.12 ; 6317.44,3593.12 6317.44,4718.12 ; 6652.35,3593.12 6652.35,4718.12 ; 7341.16,3593.12 7341.16,4718.12 ; 7610.1,3593.12 7610.1,4718.12 ; 7993,3593.12 7993,4718.12 ; 8752.77,3593.12 8752.77,4718.12 ; 9309.62,3593.12 9309.62,4718.12 ; 6026,3593.12 9906.95,3593.12 9906.95,4718.12 6026,4718.12 6026,3593.12
  text "Symbol" at 6071,4665.62 h36
  text "Quantity" at 6339.94,4665.62 h36
  text "Finished Hole Size" at 6674.85,4665.62 h36
  text "Plated" at 7363.66,4665.62 h36
  text "Hole Type" at 7632.6,4665.62 h36
  text "Drill Layer Pair" at 8015.5,4665.62 h36
  text "Hole Tolerance" at 8775.27,4665.62 h36
  text "Hole Length" at 9332.12,4665.62 h36
  text "6" at 6339.94,4590.62 h30
  text "35.43mil (0.900mm)" at 6674.85,4590.62 h30
  text "NPTH" at 7363.66,4590.62 h30
  text "Round" at 7632.6,4590.62 h30
  text "Top Layer - Bottom Layer" at 8015.5,4590.62 h30
  text "-" at 9332.12,4590.62 h30
  text "4" at 6339.94,4515.62 h30
  text "125.00mil (3.175mm)" at 6674.85,4515.62 h30
  text "NPTH" at 7363.66,4515.62 h30
  text "Round" at 7632.6,4515.62 h30
  text "Top Layer - Bottom Layer" at 8015.5,4515.62 h30
  text "-" at 9332.12,4515.62 h30
  text "9" at 6339.94,4440.62 h30
  text "7.87mil (0.200mm)" at 6674.85,4440.62 h30
  text "PTH" at 7363.66,4440.62 h30
  text "Round" at 7632.6,4440.62 h30
  text "Top Layer - Bottom Layer" at 8015.5,4440.62 h30
  text "-" at 9332.12,4440.62 h30
  text "211" at 6339.94,4365.62 h30
  text "12.00mil (0.305mm)" at 6674.85,4365.62 h30
  text "PTH" at 7363.66,4365.62 h30
  text "Round" at 7632.6,4365.62 h30
  text "Top Layer - Bottom Layer" at 8015.5,4365.62 h30
  text "-" at 9332.12,4365.62 h30
  text "17" at 6339.94,4290.62 h30
  text "20.00mil (0.508mm)" at 6674.85,4290.62 h30
  text "PTH" at 7363.66,4290.62 h30
  text "Round" at 7632.6,4290.62 h30
  text "Top Layer - Bottom Layer" at 8015.5,4290.62 h30
  text "-" at 9332.12,4290.62 h30
  text "72" at 6339.94,4215.62 h30
  text "40.00mil (1.016mm)" at 6674.85,4215.62 h30
  text "PTH" at 7363.66,4215.62 h30
  text "Round" at 7632.6,4215.62 h30
  text "Top Layer - Bottom Layer" at 8015.5,4215.62 h30
  text "-" at 9332.12,4215.62 h30
  text "58" at 6339.94,4140.62 h30
  text "40.16mil (1.020mm)" at 6674.85,4140.62 h30
  text "PTH" at 7363.66,4140.62 h30
  text "Round" at 7632.6,4140.62 h30
  text "Top Layer - Bottom Layer" at 8015.5,4140.62 h30
  text "-" at 9332.12,4140.62 h30
  text "20" at 6339.94,4065.62 h30
  text "45.28mil (1.150mm)" at 6674.85,4065.62 h30
  text "PTH" at 7363.66,4065.62 h30
  text "Round" at 7632.6,4065.62 h30
  text "Top Layer - Bottom Layer" at 8015.5,4065.62 h30
  text "-" at 9332.12,4065.62 h30
  text "1" at 6339.94,3990.62 h30
  text "59.06mil (1.500mm)" at 6674.85,3990.62 h30
  text "PTH" at 7363.66,3990.62 h30
  text "Round" at 7632.6,3990.62 h30
  text "Top Layer - Bottom Layer" at 8015.5,3990.62 h30
  text "-" at 9332.12,3990.62 h30
  text "4" at 6339.94,3915.62 h30
  text "62.99mil (1.600mm)" at 6674.85,3915.62 h30
  text "PTH" at 7363.66,3915.62 h30
  text "Round" at 7632.6,3915.62 h30
  text "Top Layer - Bottom Layer" at 8015.5,3915.62 h30
  text "-" at 9332.12,3915.62 h30
  text "1" at 6339.94,3840.62 h30
  text "21.00mil (0.533mm)" at 6674.85,3840.62 h30
  text "NPTH" at 7363.66,3840.62 h30
  text "Slot" at 7632.6,3840.62 h30
  text "Top Layer - Bottom Layer" at 8015.5,3840.62 h30
  text "87.00mil (2.210mm)" at 9332.12,3840.62 h30
  text "2" at 6339.94,3765.62 h30
  text "21.00mil (0.533mm)" at 6674.85,3765.62 h30
  text "NPTH" at 7363.66,3765.62 h30
  text "Slot" at 7632.6,3765.62 h30
  text "Top Layer - Bottom Layer" at 8015.5,3765.62 h30
  text "162.00mil (4.115mm)" at 9332.12,3765.62 h30
  text "2" at 6339.94,3690.62 h30
  text "23.62mil (0.600mm)" at 6674.85,3690.62 h30
  text "PTH" at 7363.66,3690.62 h30
  text "Slot" at 7632.6,3690.62 h30
  text "Top Layer - Bottom Layer" at 8015.5,3690.62 h30
  text "51.18mil (1.300mm)" at 9332.12,3690.62 h30
  text "407 Total" at 6339.94,3615.62 h30
  text "Slot definitions :" at 6071,3533.14 h30
  text "Routed Path Length" at 6601.34,3533.14 h30
  text "= Calculated from tool start centre position to tool end centre position." at 7166.68,3533.14 h30
  text "Hole Length" at 6601.34,3473.15 h30
  text "= Routed Path Length + Tool Size = Slot length as defined in the PCB layout" at 6961.74,3473.15 h30
  text ".Layer_Name" at 527,-1523.49 h30
M17 Embedded Cavity:
  text ".Layer_Name" at 527,-1523.49 h30
M18 Embedded Assembly:
  text ".Layer_Name" at 527,-1523.49 h30
M19 Embedded Keepout:
  text ".Layer_Name" at 527,-1523.49 h30

## Dimensions
0,0 to 2300,0 on M2 Board Dimensions
0,0 to 0,4195 on M2 Board Dimensions
-50,-1065 to 950,-1065 on M2 Board Dimensions

## Text inside footprints (layer, text, board x,y; h text height)
D1: Top Overlay "A" at 1946.6,455.43 h20 r90
J1/J3: Top Overlay "J1" at 140,2220 h30; Top Overlay "J3" at 421,2219 h30; Top Overlay "10" at 227.66,1158.65 h30; Top Overlay "1" at 245,2220 h30; Top Overlay "30" at 327.71,1158.84 h30; Top Overlay "21" at 330,2220 h30
J2/J4: Top Overlay "J4" at 1844,2220 h30; Top Overlay "J2" at 2098.43,2220 h30; Top Overlay "20" at 2025,2220 h30; Top Overlay "11" at 2033,1150 h30; Top Overlay "31" at 1930,1150 h30; Top Overlay "40" at 1925,2220 h30
Logo6: Bottom Overlay "For evaluation only; not FCC approved for resale." at 1940,251 h30